# EAGLE board mp-rair (EAGLE 6.3)
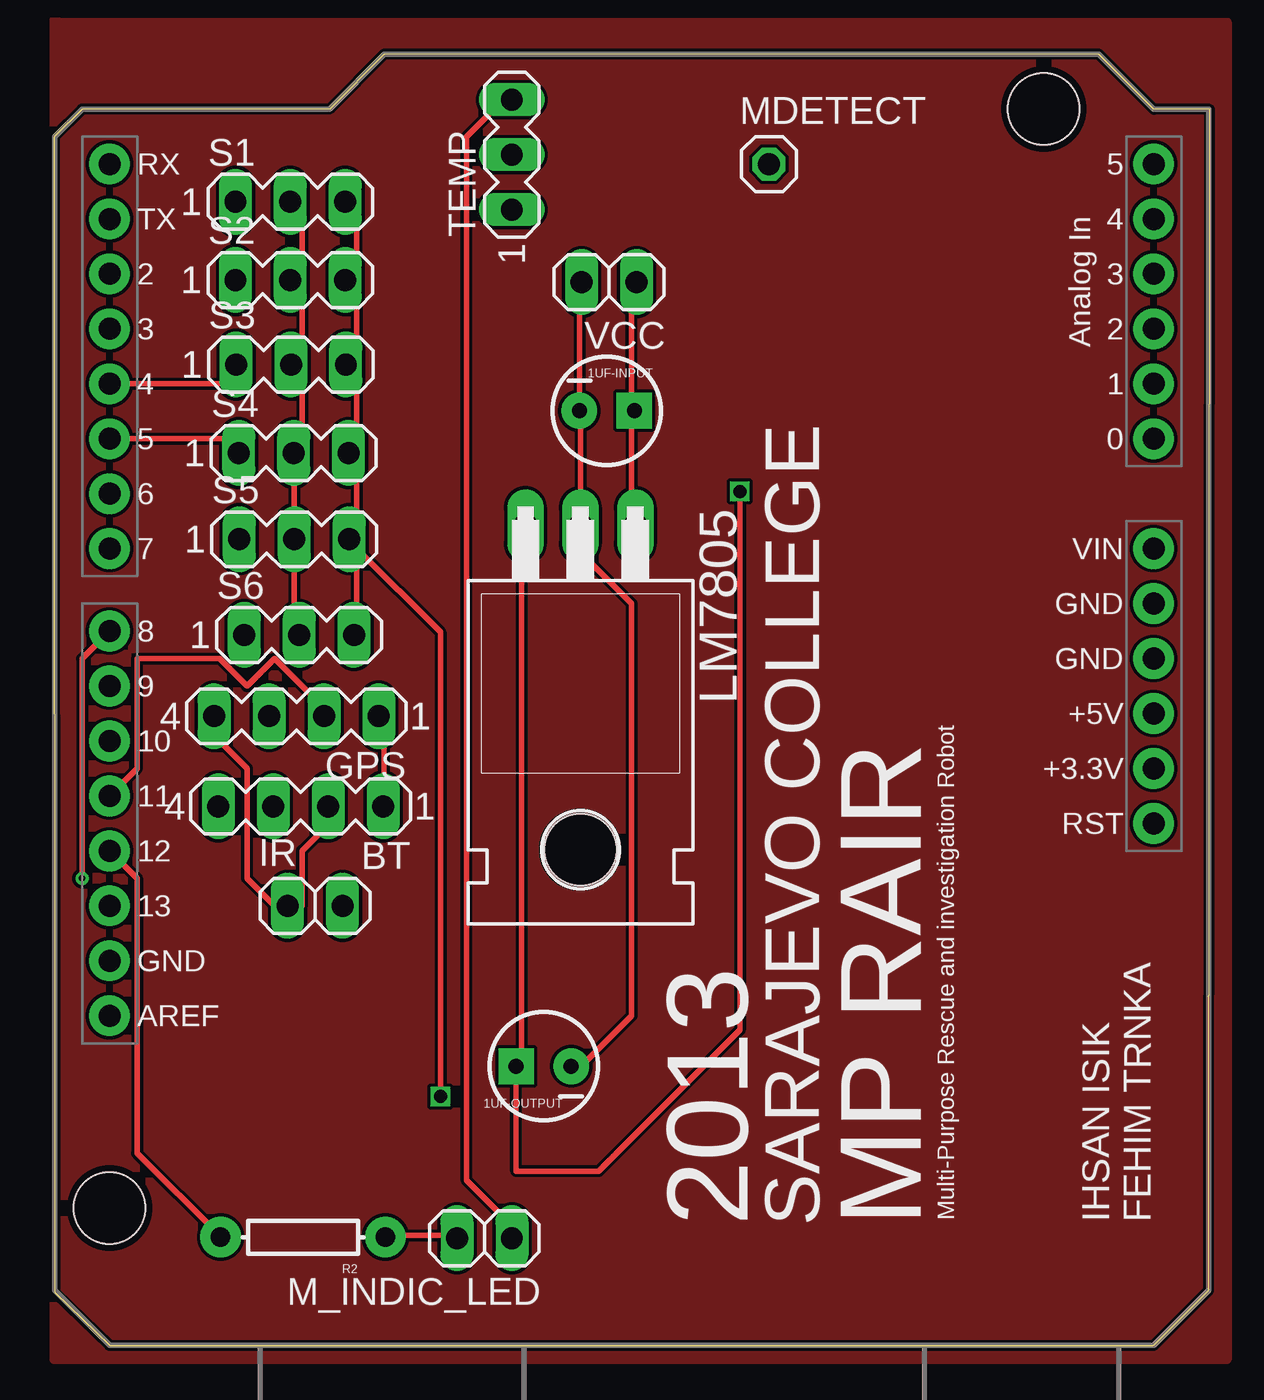
[diagram p0: board, top side]
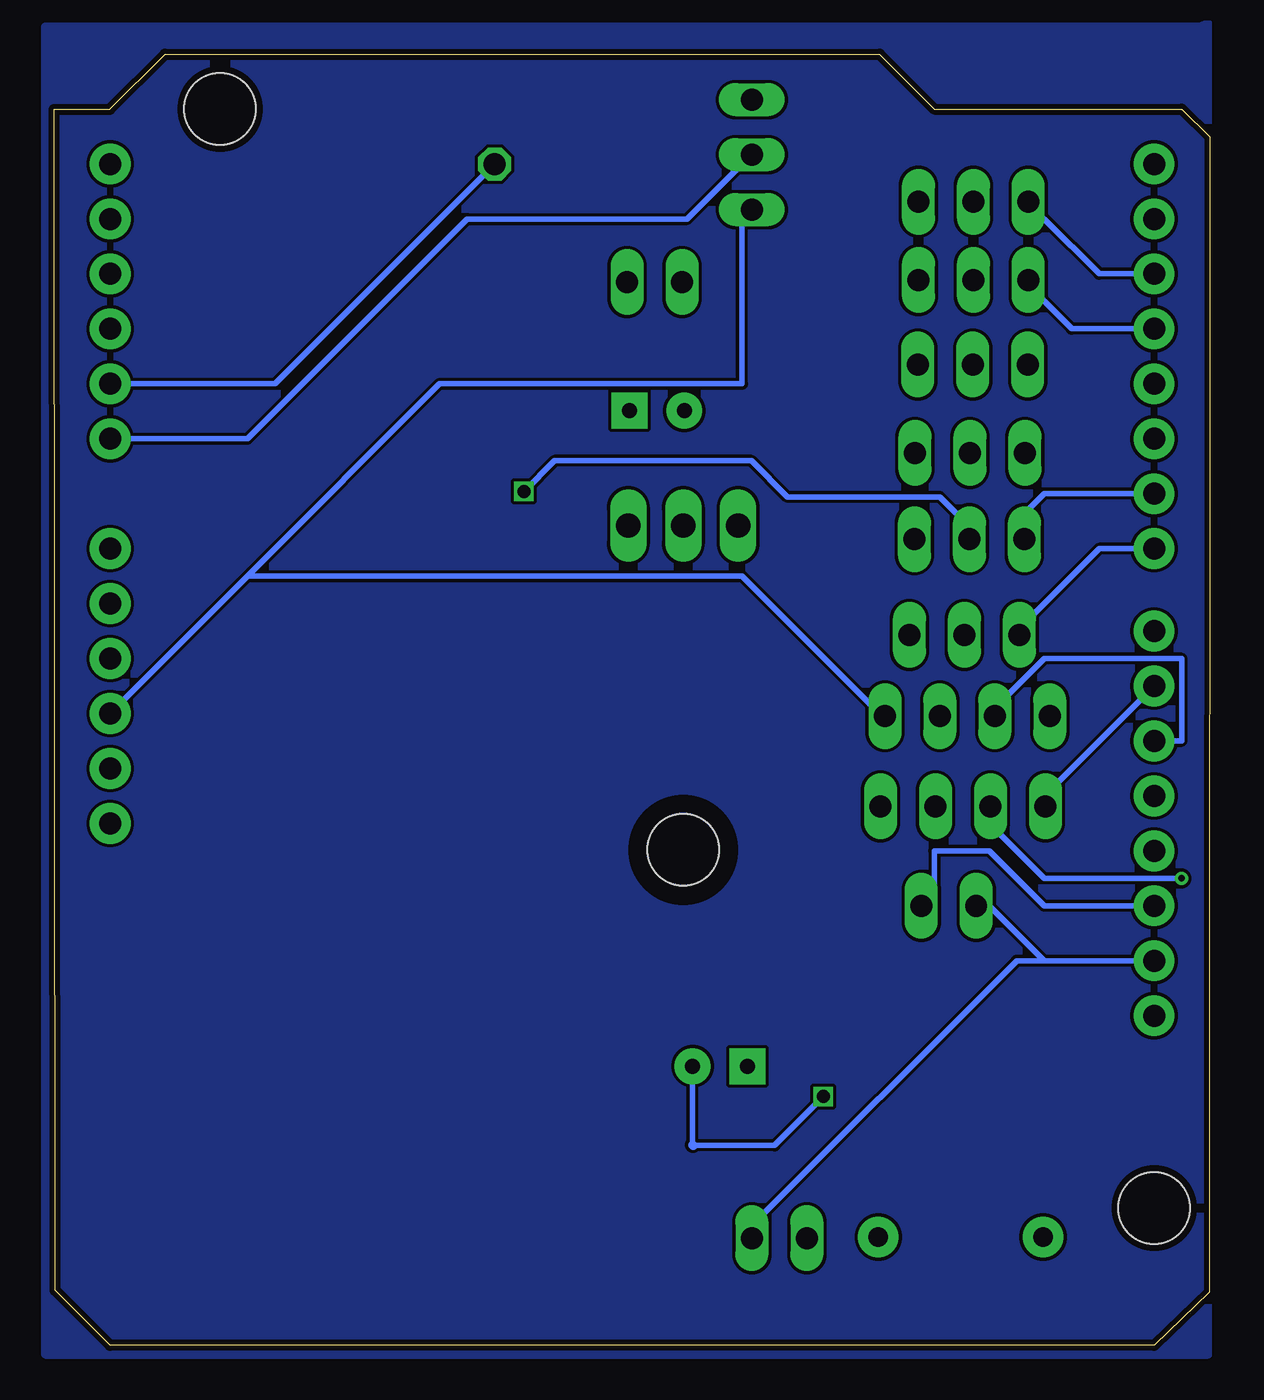
[diagram p1: board, bottom side, seen from below]

Size 53.42 x 59.69 mm. Coordinates in mm from the lower left corner, seen from the top.
Outline: 2.57,0 50.83,0 53.37,2.54 53.42,57.14 50.84,57.14 48.29,59.69 15.27,59.69 12.73,57.15 1.3,57.15 0,55.87 0.03,2.46 2.57,0
Copper layers (1*16): Top 0.035mm / dielectric 1.5mm / Bottom 0.035mm
Design rules "Fusion_eagle_rule_v1.1": minimum track width 6mil, minimum drill 12mil, track to track 6mil, track to pad 6mil, pad to pad 6mil, via to via 6mil, smd to smd 0mil, copper to edge 10mil, drill to drill 10mil, minimum pad ring 10mil, minimum via ring 6mil, stop-mask expansion 2mil, vias tented up to drill 100mil, thermal gap 10mil

## Footprints (pad centres in the part's own frame; a part is rotated, then mirrored left to right if it is on the bottom)
CPOL-RADIAL-10UF-25V = drill 0.7 pad 1.651 square: 1 1.27,0 | drill 0.7 pad 1.651: 2 -1.27,0
DUEMILANOVE_SHIELD = drill 1.016 pad 1.88: 3.3V 50.8,26.67; 5V 50.8,29.21; A0 50.8,41.91; A1 50.8,44.45; A2 50.8,46.99; A3 50.8,49.53; A4 50.8,52.07; A5 50.8,54.61; AREF 2.54,15.24; D2 2.54,49.53; D3 2.54,46.99; D4 2.54,44.45; D5 2.54,41.91; D6 2.54,39.37; D7 2.54,36.83; D8 2.54,33.02; D9 2.54,30.48; D10 2.54,27.94; D11 2.54,25.4; D12 2.54,22.86; D13 2.54,20.32; GND@0 50.8,31.75; GND@1 50.8,34.29; GND@2 2.54,17.78; RES 50.8,24.13; RX 2.54,54.61; TX 2.54,52.07; VIN 50.8,36.83 | hole 3.302: 45.72,57.15; 2.54,6.35
MA04-1 = drill 1.016 long: 1 -3.81,0; 2 -1.27,0; 3 1.27,0; 4 3.81,0
1X02 = drill 1.016 long: 1 -1.27,0; 2 1.27,0
TO220H = drill 1.118 long: 1 -2.54,-10.16; 2 0,-10.16; 3 2.54,-10.16 | hole 3.302: 0,4.826
1X01 = drill 1.016 octagon: 1 0,0
AXIAL-0.3 = drill 0.9 pad 1.88: P$1 -3.81,0; P$2 3.81,0
MA03-1 = drill 1.016 long: 1 -2.54,0; 2 0,0; 3 2.54,0

## Placement (x,y rotation side)
1UF-INPUT  [CPOL-RADIAL-10UF-25V]  25.55,43.21 0 top
1UF-OUTPUT  [CPOL-RADIAL-10UF-25V]  22.63,12.9 180 top
ARDUINO  ARDUINO_SHIELDLABEL  [DUEMILANOVE_SHIELD]  0.03,0 0 top
BT  [MA04-1]  11.4,24.92 180 top
GPS  [MA04-1]  11.2,29.08 180 top
IR  [1X02]  12.06,20.32 0 top
LM7805  [TO220H]  24.33,27.74 180 top
M_INDIC_LED  [1X02]  19.89,4.95 180 top
MDETECT  [1X01]  33.05,54.61 0 top
R2  [AXIAL-0.3]  11.51,5 180 top
S1  [MA03-1]  10.92,52.86 0 top
S2  [MA03-1]  10.92,49.25 0 top
S3  [MA03-1]  10.95,45.34 0 top
S4  [MA03-1]  11.07,41.25 0 top
S5  [MA03-1]  11.1,37.26 0 top
S6  [MA03-1]  11.33,32.84 0 top
TEMP  [MA03-1]  21.16,55.04 90 top
VCC  [1X02]  25.65,49.15 180 top

## Library data of the parts
1UF-INPUT 1UF-OUTPUT R2 = SparkFun-Passives
ARDUINO = SparkFun-Boards
BT GPS S1-S6 TEMP = con-lstb; OC_FARNELL: unknown; OC_NEWARK: unknown
IR M_INDIC_LED MDETECT VCC = pinhead
LM7805 = linear

## Nets
N$1: ARDUINO.D2 S1.1
N$2: ARDUINO.5V BT.1 GPS.1 TEMP.1
N$3: ARDUINO.GND@2 BT.2 GPS.4 IR.1 M_INDIC_LED.1 TEMP.3
N$4: ARDUINO.D3 S2.1
N$5: ARDUINO.D4 S3.1
N$6: ARDUINO.D5 S4.1
N$7: ARDUINO.D6 S5.1
N$8: ARDUINO.D7 S6.1
N$9: 1UF-INPUT.2 1UF-OUTPUT.2 LM7805.2 S1.3 S2.3 S3.3 S4.3 S5.3 S6.3 VCC.2
N$10: 1UF-OUTPUT.1 LM7805.3 S1.2 S2.2 S3.2 S4.2 S5.2 S6.2
N$11: ARDUINO.A0 TEMP.2
N$12: ARDUINO.D8 BT.3
N$13: ARDUINO.D9 BT.4
N$14: M_INDIC_LED.2 R2.P$1
N$15: 1UF-INPUT.1 LM7805.1 VCC.1
N$16: ARDUINO.D12 R2.P$2
N$17: ARDUINO.D11 GPS.2
N$19: ARDUINO.D13 IR.2
N$20: ARDUINO.D10 GPS.3
N$21: ARDUINO.A1 MDETECT.1

## Tracks (layer width: path | path; a pad name or v marks a point on that pad's centre or on a via)
N$1
  Bottom 0.254: ARDUINO.D2 5.11,49.53 7.65,52.07 S1.1
N$2
  Top 0.254: GPS.1 15.27,27.94 15.27,25.4 BT.1
  Bottom 0.254: ARDUINO.5V 44.48,35.56 | 44.48,35.56 35.59,44.45 21.62,44.45 21.62,52.07 TEMP.1 | 44.48,35.56 21.62,35.56 15.27,29.21 GPS.1
N$3
  Top 0.254: GPS.4 7.65,27.94 8.92,26.67 8.92,21.59 10.19,20.32 IR.1 11.46,20.32 11.46,22.86 12.73,24.13 BT.2 | TEMP.3 20.35,57.15 19.08,55.88 19.08,7.62 21.62,5.08 M_INDIC_LED.1
  Bottom 0.254: 7.65,17.78 10.19,20.32 IR.1 | ARDUINO.GND@2 7.65,17.78 | 7.65,17.78 8.92,17.78 21.62,5.08 M_INDIC_LED.1
N$4
  Bottom 0.254: ARDUINO.D3 6.38,46.99 7.65,48.26 S2.1
N$5
  Top 0.254: ARDUINO.D4 8.92,44.45 S3.1
N$6
  Top 0.254: ARDUINO.D5 8.92,41.91 S4.1
N$7
  Bottom 0.254: ARDUINO.D6 7.65,39.37 8.92,38.1 S5.1
N$8
  Bottom 0.254: ARDUINO.D7 5.11,36.83 8.92,33.02 S6.1
N$9  (via drill 0.6)
  Top 0.254: 14,36.83 14,33.02 S6.3 | 14,36.83 S5.3 14,38.1 14,40.64 S4.3 14,41.91 14,44.45 S3.3 14,45.72 14,48.26 S2.3 14,49.53 14,52.07 S1.3 | 1UF-OUTPUT.2 24.16,12.7 26.7,15.24 26.7,34.29 24.16,36.83 LM7805.2 24.33,43.16 | 24.28,49.05 1UF-INPUT.2 | 14,36.83 17.86,32.97 v17.86,11.51
  Top 0.406: VCC.2 24.28,49.05 | 1UF-INPUT.2 24.33,43.16
  Bottom 0.254: 14,41.91 S4.3 | v17.86,11.51 20.12,9.25 23.88,9.25 | 23.9,9.27 1UF-OUTPUT.2
  Bottom 0.406: 23.88,9.25 23.9,9.27
N$10  (via drill 0.6)
  Top 0.254: S1.2 11.46,52.07 11.46,49.53 S2.2 11.46,48.26 11.46,45.72 S3.2 11.46,44.45 11.46,41.91 S4.2 | LM7805.3 21.62,36.83 21.62,12.7 1UF-OUTPUT.1 21.36,8.05 25.17,8.05 31.7,14.58 v31.7,39.47 | 11.1,41.22 S5.2 11.1,33.07
  Top 0.406: S4.2 11.1,41.22 | 11.1,33.07 S6.2
  Bottom 0.254: 11.1,37.85 12.47,39.22 19.51,39.22 21.18,40.89 30.28,40.89 v31.7,39.47
  Bottom 0.406: S5.2 11.1,37.85
N$11
  Bottom 0.254: ARDUINO.A0 44.48,41.91 34.32,52.07 24.16,52.07 21.62,54.61 TEMP.2
N$12  (via drill 0.3)
  Top 0.254: v1.3,21.59 1.3,31.75 ARDUINO.D8
  Bottom 0.254: v1.3,21.59 7.65,21.59 10.19,24.13 BT.3
N$13
  Bottom 0.254: ARDUINO.D9 7.65,25.4 BT.4
N$14
  Top 0.254: M_INDIC_LED.2 19.08,5.08 15.27,5.08 R2.P$1
N$15
  Top 0.254: 26.7,43.18 26.7,48.26 VCC.1 | 26.7,43.18 26.7,38.1 LM7805.1 | 26.7,43.18 1UF-INPUT.1
N$16
  Top 0.254: ARDUINO.D12 3.84,21.59 3.84,8.89 7.65,5.08 R2.P$2
N$17
  Top 0.254: ARDUINO.D11 3.84,26.67 3.84,31.75 7.65,31.75 8.92,30.48 10.19,31.75 12.73,29.21 GPS.2
N$18
  pour Bottom: 0.48,60.93 53.82,60.93 53.82,-0.41 0.08,-0.41 0.08,61.09
N$19
  Bottom 0.254: ARDUINO.D13 7.65,20.32 10.19,22.86 12.73,22.86 12.73,20.32 IR.2
N$20
  Bottom 0.254: ARDUINO.D10 1.3,27.94 1.3,31.75 7.65,31.75 10.19,29.21 GPS.3
N$21
  Bottom 0.254: MDETECT.1 43.21,44.45 ARDUINO.A1
N$22
  pour Top: 0.23,61.16 54.23,61.16 54.23,-0.66 0,-0.66 0,61.26

## Text on the board
tPlace: Multi-Purpose Rescue and investigation Robot | 2013 | SARAJEVO COLLEGE | MP RAIR | IHSAN ISIK / FEHIM TRNKA